# Altium PCB LAN9512_pcb.PcbDoc (part 1 of 2)
Units mm, origin at the board's own origin, x right, y up, seen from the top; angles counter-clockwise.
Board outline 57.95 x 40.02 mm, 2 copper layers (Top Layer, Bottom Layer), stack 1.671 mm thick; 67 components, 38 nets, 238 pads, 97 vias.
Unrouted connection lines stored in the file: 1.
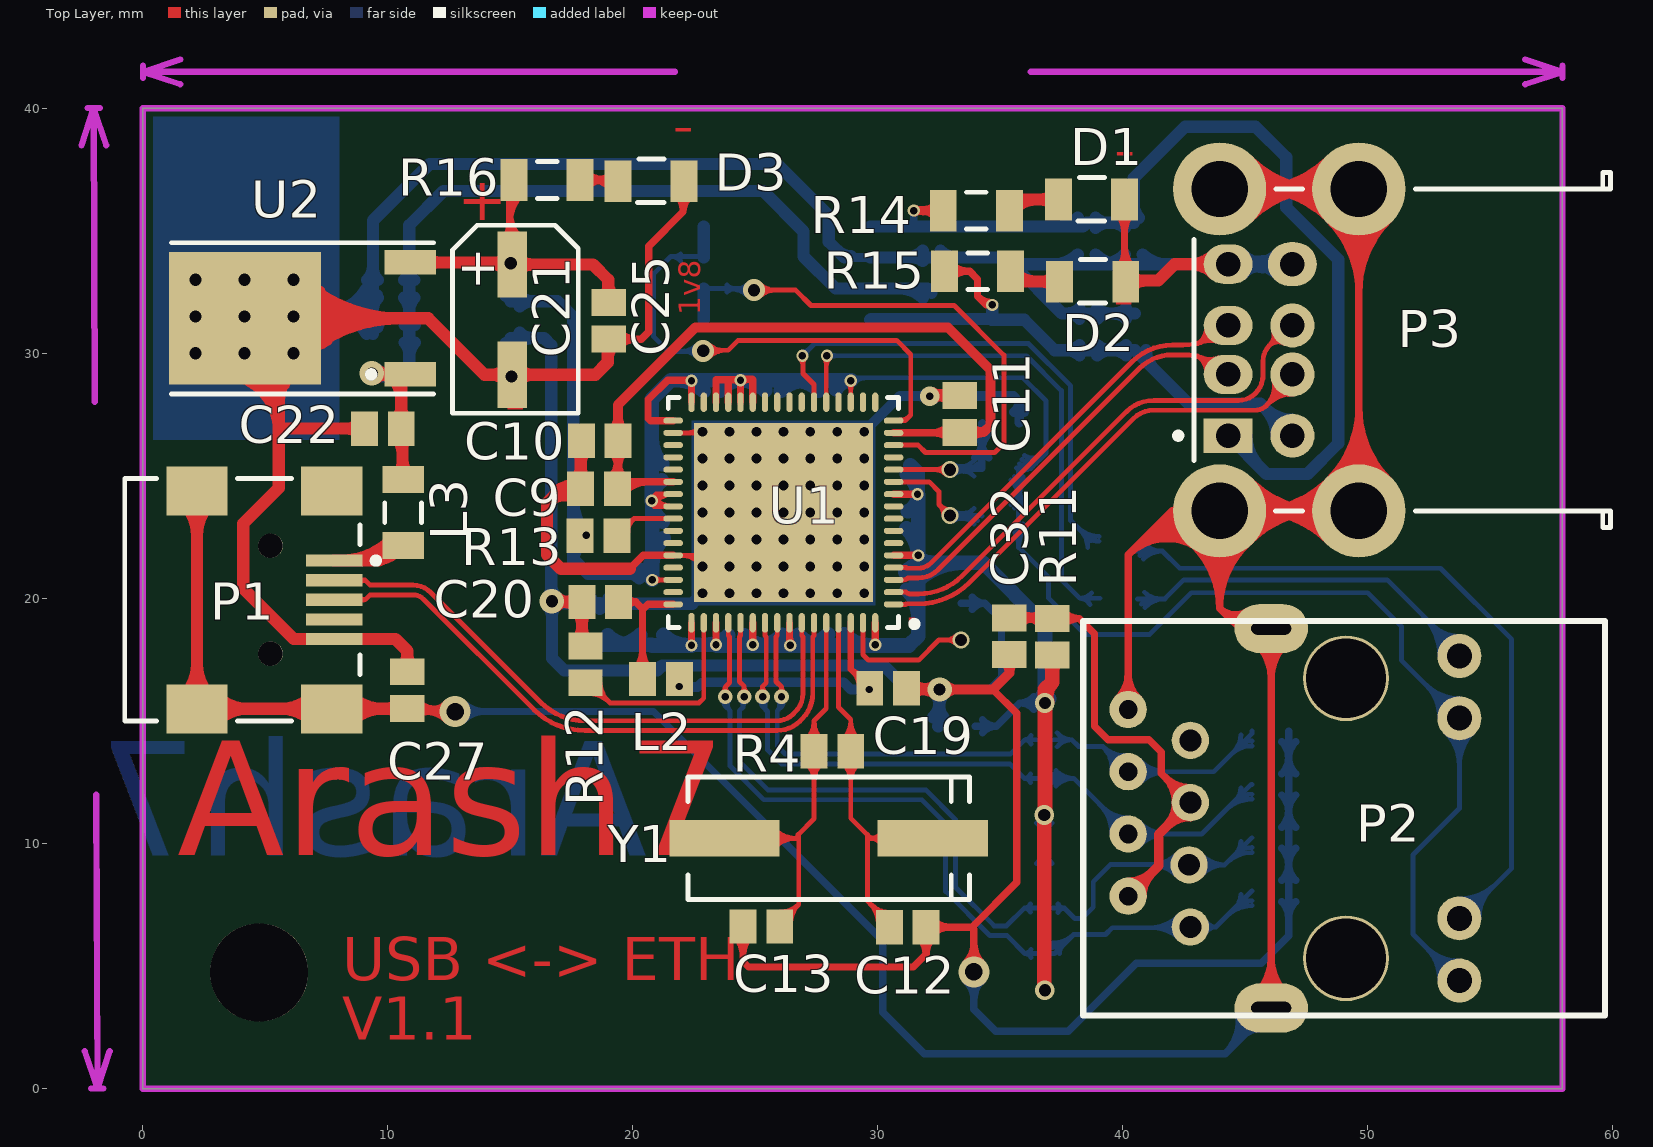
[diagram p0: Top Layer view]
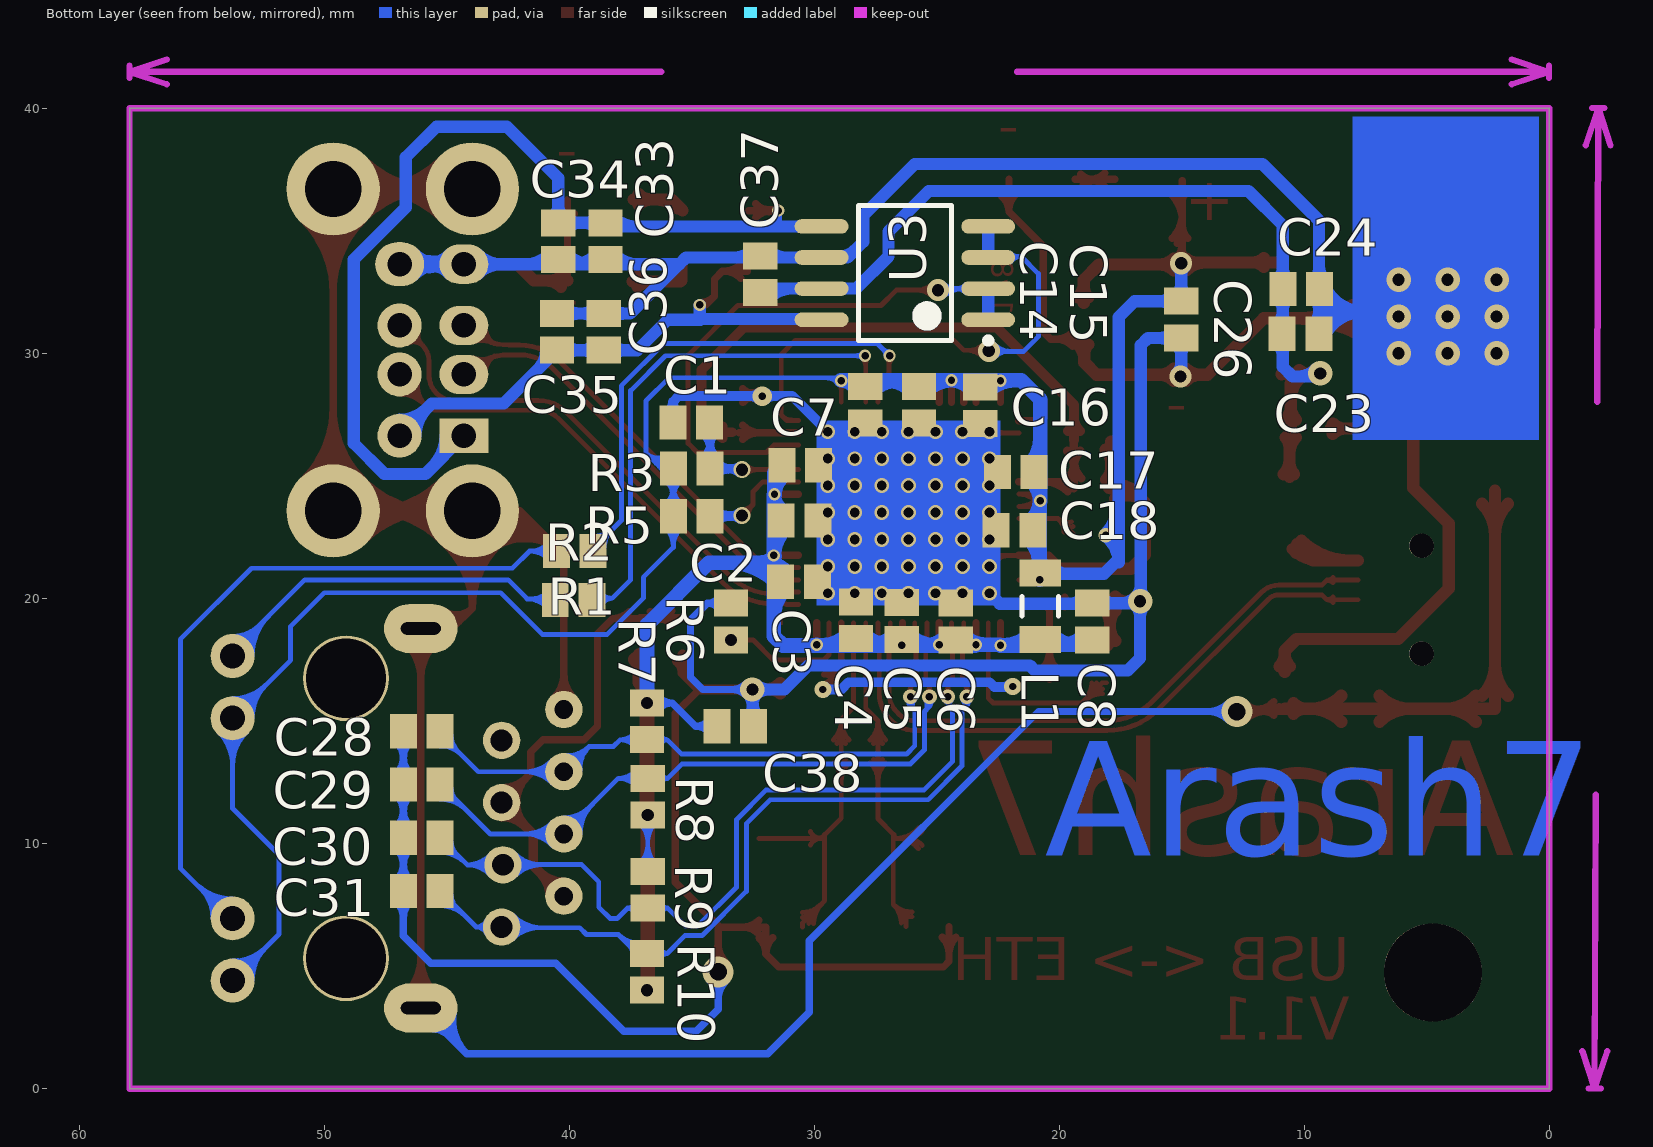
[diagram p1: Bottom Layer view, seen from below]

## Layer stack, top to bottom
Top Layer: signal copper 0.0356
Dielectric: core 1.6, FR-4, Dk 4.8
Bottom Layer: signal copper 0.0356

## Board outline
0,0 0,40.025 57.95,40.025 57.95,0

## Design rules (kind name [scope] priority, off if disabled: settings)
Clearance [All] p1: gap=0.1
DiffPairsRouting DiffPair_ETH_RXDiffPairsRouting [All] p1: maxlimit=0.2 minlimit=0.2 mostfreqgap=0.2 maxuncoupledlength=12.7
DiffPairsRouting [All] p2: maxlimit=0.254 minlimit=0.254 mostfreqgap=0.254 maxuncoupledlength=12.7
MatchedLengths DiffPair_ETH_RXMatchedLengths [All] p1: tolerance=25.4 checknetsindiffpair=TRUE checkdiffpairvsdiffpair=TRUE checkothers=TRUE
PolygonConnect [All] p1: connectstyle=Relief reliefconductorwidth=0.254 reliefentries=4 polygonreliefangle="90 Angle" airgapwidth=0.254
RoomDefinition USB_ETH_Sch [InComponentClass('USB_ETH_Sch')] p1: confinementstyle=ConfineOut formatcopy=TRUE lockcomponents=FALSE outline 62.475,19.724 159.856,19.724 159.856,44.275 62.475,44.275
RoomDefinition Schematic_1 [InComponentClass('Schematic_1')] p2: confinementstyle=ConfineOut formatcopy=TRUE lockcomponents=FALSE outline 62.5,1.449 187.6,1.449 187.6,17.475 62.5,17.475
RoutingVias [All] p1: holewidth=0.711 width=1.27 viastyle="Through Hole" minholewidth=0.711 minwidth=1.27 maxholewidth=0.711 maxwidth=1.27
SolderMaskExpansion [All] p1: expansion=0.102
Width DiffPair_ETH_RXWidth [All] p1: maxlimit=1 minlimit=0.2 preferedwidth=0.2
Width [All] p2: maxlimit=1 minlimit=0.2 preferedwidth=0.2
27 further rules are at their usual default settings.

## Classes and differential pairs
component class Schematic_1: C1 C2 C3 C4 C5 C6 C7 C8 C9 C10 C11 C12 C13 C14 C15 C16 C17 C18 C19 C20 C21 C22 C23 C24 C25 C26 C27 D3 L1 L2 L3 P1 R1 R2 R3 R4 R16 U1 U2 Y1
component class USB_ETH_Sch: C28 C29 C30 C31 C32 C33 C34 C35 C36 C37 C38 D1 D2 P2 P3 R5 R6 R7 R8 R9 R10 R11 R12 R13 R14 R15 U3
differential pair RX: +RX_P -RX_N
differential pair TX: +TX_P -TX_N
differential pair USB0: +USB0_P -USB0_N
differential pair USB3: +USB3_P -USB3_N
differential pair USB2: +USB2_P -USB2_N

## Components (designator, comment, footprint, x,y, rotation, side; value= is the part's Value field where it differs from the comment)
C1 "Cap" C0805 35.025,27.2 r180 bottom
C2 "Cap" C0805 30.6,23.2 r0 bottom
C3 "Cap" C0805 30.625,20.7 r0 bottom
C4 "Cap" C0805 28.3,19.125 r270 bottom
C5 "Cap" C0805 26.425,19.1 r270 bottom
C6 "Cap" C0805 24.225,19.075 r270 bottom
C7 "Cap" C0805 30.575,25.45 r0 bottom
C8 "Cap" C0805 18.65,19.075 r270 bottom
C9 "Cap" C0805 18.625,24.5 r0 top
C10 "Cap" C0805 18.65,26.45 r0 top
C11 "Cap" C0805 33.35,27.55 r270 top
C12 "Cap" C0805 31.225,6.6 r180 top
C13 "Cap" C0805 25.25,6.625 r0 top
C14 "Cap" C0805 27.925,27.925 r90 bottom
C15 "Cap" C0805 25.725,27.925 r90 bottom
C16 "Cap" C0805 23.225,27.9 r90 bottom
C17 "Cap" C0805 21.775,25.175 r180 bottom
C18 "Cap" C0805 21.825,22.8 r180 bottom
C19 "Cap" C0805 30.425,16.35 r180 top
C20 "Cap" C0805 18.675,19.875 r0 top
C21 "Capacitor" Capacitor 14.975,31.4 r90 top
C22 "Cap" C0805 9.8,26.95 r0 top
C23 "Cap" C0805 10.15,30.825 r0 bottom
C24 "Cap" C0805 10.125,32.65 r0 bottom
C25 "Cap" C0805 19.025,31.35 r90 top
C26 "Cap" C0805 15.025,31.4 r90 bottom
C27 "Cap" C0805 10.8,16.275 r270 top
C28 "Cap" C0805 46.025,14.6 r180 bottom
C29 "Cap" C0805 46.025,12.425 r180 bottom
C30 "Cap" C0805 46.025,10.25 r180 bottom
C31 "Cap" C0805 46.025,8.075 r180 bottom
C32 "Cap" C0805 35.375,18.475 r90 top
C33 "Cap" C0805 38.525,34.6 r90 bottom
C34 "Cap" C0805 40.45,34.6 r90 bottom
C35 "Cap" C0805 40.5,30.9 r270 bottom
C36 "Cap" C0805 38.6,30.9 r270 bottom
C37 "Cap" C0805 32.2,33.25 r270 bottom
C38 "Cap" C0805 33.225,14.8 r0 bottom
D1 "LED0" SMD_LED_1206 38.725,36.3 r0 top
D2 "LED0" SMD_LED_1206 38.775,32.95 r0 top
D3 "LED0" SMD_LED_1206 20.75,37.05 r0 top
L1 "Inductor" C1206 20.775,19.7 r270 bottom
L2 "Inductor" C0805 21.15,16.725 r180 top
L3 "Inductor" C1206 10.625,23.525 r270 top
P1 "Mini USB" "Mini USB" 4.45,20.175 r180 top
P2 "SK02-111008BNL" RJ45+MAG 48.225,11.175 r0 top
P3 "USB Dual" USB_Duble 50.15,30.4 r0 top
R1 "Res1" c0805 39.825,19.95 r180 bottom
R2 "Res1" c0805 39.775,21.95 r180 bottom
R3 "Res1" c0805 35,25.325 r0 bottom
R4 "Res1" c0805 28.15,13.775 r0 top
R5 "Res1" c0805 35,23.375 r180 bottom
R6 "Res1" c0805 33.4,19.075 r270 bottom
R7 "Res1" c0805 36.825,15 r90 bottom
R8 "Res1" c0805 36.8,11.925 r270 bottom
R9 "Res1" c0805 36.8,8.125 r90 bottom
R10 "Res1" c0805 36.825,4.775 r270 bottom
R11 "Res1" c0805 37.125,18.45 r270 top
R12 "Res1" c0805 18.075,17.325 r270 top
R13 "Res1" c0805 18.6,22.575 r0 top
R14 "Res1" C1206 34.025,35.85 r180 top
R15 "Res1" C1206 34.075,33.375 r180 top
R16 "Res1" C1206 16.5,37.1 r180 top
U1 "ETH-USB" QFN64 26.15,23.525 r180 top
U2 "LF33ABDT" LF33-TO-252 7.55,31.45 r90 top
U3 "MIC2026" SSOP8 26.3,33.3 r0 bottom
Y1 "XTAL" SMD_Crystal 28,10.225 r180 top

## Footprints (in the part's own frame and the unit in brackets; to place one, negate y for a bottom-side part, rotate by r counter-clockwise, add the part's x,y. Pads: shape width x height; smd on the part's side, far side on the other; paste and mask are expansions set on the pad)
C0805 [mm] "Chip Capacitor, Body 2.0x1.3mm, IPC High Density"
  rect 1.1x1.4 smd: 1(-0.75,0) 2(0.75,0)
  body extent -1.1,-0.72 1.1,0.72, height 1.4
c0805 [mm] "Chip Capacitor, Body 2.0x1.3mm, IPC High Density"
  rect 1.1x1.4 smd: 1(-0.75,0) 2(0.75,0)
  body extent -1.1,-0.72 1.1,0.72, height 1.4
C1206 [mm] "Chip Capacitor, Body 3.2x1.6mm, IPC High Density"
  rect 1.1x1.7 smd: 1(-1.35,0) 2(1.35,0)
  silkscreen extent -0.4,-0.75 0.4,0.75, body extent -1.7,-0.9 1.7,0.9, height 1.3
Capacitor [mm] "SMD electrolite capacitor"
  rect 2.7x1.2 smd: 1(-2.25,-0.1) 2(2.25,-0.1)
  silkscreen extent -3.83,-2.8 3.85,2.32
LF33-TO-252 [mm]
  rect 1x2.1 smd: 1(-2.285,-3.375) 3(2.285,-3.375)
  rect 5.4x6.2 smd: 4(0,3.375)
  silkscreen extent -3.09,-4.32 3.09,6.38, body extent -3.3,-3.55 3.28,6.15, height 2.3
"Mini USB" [mm]
  rect 2.3x0.5 smd: 1(-3.362,-1.387) 2(-3.362,-0.587) 3(-3.362,0.213) 4(-3.362,1.013) 5(-3.362,1.813)
  rect 2.5x2 smd: 6(-3.262,4.663) 7(2.238,4.663) 8(-3.262,-4.237) 9(2.238,-4.237)
  round 1 hole 1 unplated: MH1(-0.762,2.413) MH2(-0.762,-1.987)
  silkscreen extent -5.19,-4.74 5.19,5.16, body extent -4.13,-4.85 5.12,5.05, height 3.93
QFN64 [mm] "QFN, 64-Leads, Body 9.00x9.00mm, Pitch 0.50mm, Thermal Pad 7.30x7.30mm, IPC Medium Density"
  oval 0.8x0.25 smd: 1(-4.5,3.75) 2(-4.5,3.25) 3(-4.5,2.75) 4(-4.5,2.25) 5(-4.5,1.75) 6(-4.5,1.25) 7(-4.5,0.75) 8(-4.5,0.25) 9(-4.5,-0.25) 10(-4.5,-0.75) 11(-4.5,-1.25) 12(-4.5,-1.75) 13(-4.5,-2.25) 14(-4.5,-2.75) 15(-4.5,-3.25) 16(-4.5,-3.75) 33(4.5,-3.75) 34(4.5,-3.25) 35(4.5,-2.75) 36(4.5,-2.25) 37(4.5,-1.75) 38(4.5,-1.25) 39(4.5,-0.75) 40(4.5,-0.25) 41(4.5,0.25) 42(4.5,0.75) 43(4.5,1.25) 44(4.5,1.75) 45(4.5,2.25) 46(4.5,2.75) 47(4.5,3.25) 48(4.5,3.75)
  oval 0.25x0.8 smd: 17(-3.75,-4.5) 18(-3.25,-4.5) 19(-2.75,-4.5) 20(-2.25,-4.5) 21(-1.75,-4.5) 22(-1.25,-4.5) 23(-0.75,-4.5) 24(-0.25,-4.5) 25(0.25,-4.5) 26(0.75,-4.5) 27(1.25,-4.5) 28(1.75,-4.5) 29(2.25,-4.5) 30(2.75,-4.5) 31(3.25,-4.5) 32(3.75,-4.5) 49(3.75,4.5) 50(3.25,4.5) 51(2.75,4.5) 52(2.25,4.5) 53(1.75,4.5) 54(1.25,4.5) 55(0.75,4.5) 56(0.25,4.5) 57(-0.25,4.5) 58(-0.75,4.5) 59(-1.25,4.5) 60(-1.75,4.5) 61(-2.25,4.5) 62(-2.75,4.5) 63(-3.25,4.5) 64(-3.75,4.5)
  rect 7.3x7.3 smd: 65(0,0)
  silkscreen extent -5.48,-4.7 4.7,4.7, body extent -4.52,-4.52 4.52,4.52, height 0.9
RJ45+MAG [mil]
  round 60 hole 35.04: 1(-215,-180) 3(-217.13,-80) 5(-215,20) 7(-215,120)
  round 60 hole 30: 2(-315,-130.39) 4(-315,-30.39) 6(-315,69.61) 8(-315,169.61)
  round 137.8 hole 127.95: 3.25(35,-230.2) 3.25(35,219.8)
  round 70.87 hole 40.16: 9(217.28,-266.02) 10(217.28,-166.02) 11(217.28,155.63) 12(217.28,255.63)
  oval 118.11x78.74 hole 19.68 slot 64.17 at 0 deg: 13(-85.08,-310.12) 13(-85.08,299.72)
  silkscreen extent -387,-322 451,312, body extent -378,-321 462,309, height 580
SMD_Crystal [mm]
  rect 4.5x1.5 smd: 1(-4.25,0) 2(4.25,0)
  silkscreen extent -5.75,-2.5 5.75,2.5, body extent -6.25,-2.4 6.25,2.4, height 4
SMD_LED_1206 [mm] "Chip Capacitor, 2-Leads, Body 1.00x0.50mm, IPC Medium Density"
  rect 1.1x1.7 smd: 1(-1.35,0) 2(1.35,0)
  silkscreen extent -0.55,-0.87 0.53,0.9, body extent -1.6,-0.8 1.6,0.8, height 1.1
SSOP8 [mm]
  oval 2.2x0.6 smd: 1(-3.4,1.905) 2(-3.4,0.635) 3(-3.4,-0.635) 4(-3.4,-1.905) 5(3.4,-1.905) 6(3.4,-0.635) 7(3.4,0.635) 8(3.4,1.905)
  silkscreen extent -3.52,-2.75 1.9,2.88, body extent -4,-2.62 4,2.63, height 2.58
USB_Duble [mm]
  rect 2x1.4 hole 1: 1(-5.842,-3.738)
  oval 2x1.6 hole 1: 2(-5.842,-1.238) 3(-5.842,0.762) 4(-5.842,3.262)
  round 1.8 hole 1: 5(-3.222,-3.738) 6(-3.222,-1.238) 7(-3.222,0.762)
  oval 2x1.8 hole 1: 8(-3.222,3.262)
  round 3.8 hole 2.3: 9(-0.512,6.332) 10(-0.512,-6.808) 11(-6.192,6.332) 12(-6.192,-6.808)
  silkscreen extent -8.01,-7.49 9.77,7.01, body extent -7.35,-8.15 9.8,7.64, height 16.25

## Part data
C1 C2 C3 C4 C5 C6 C7 C8 C9 C10 C11 C12 C13 C14 C15 C16 C17 C18 C19 C20 C22 C23 C24 C25 C26 C27 C28 C29 C30 C31 C32 C33 C34 C35 C36 C37 C38: "Capacitor"
C21: library part "SMS capacitor"
D1 D2 D3: "Typical INFRARED GaAs LED"
P2: "Ethernet"
P3: library part USB_Double_Female
R1 R2 R3 R4 R5 R6 R7 R8 R9 R10 R11 R12 R13 R14 R15 R16: "Resistor"
U1: library part LAN9512, "USB Hub to LAN connevtor"
U2: "500mA, Very Low Drop (0.45V) Voltage Regulator"
Y1: "Crystal Oscillator"

## Free pads (board coordinates)
  round 4 hole 4: 1(4.75,4.75)

## Via types
v1: diameter 0.6, hole 0.4, Top Layer to Bottom Layer, 49 vias
v2: diameter 0.5, hole 0.3, Top Layer to Bottom Layer, 16 vias
v3: diameter 1, hole 0.5, Top Layer to Bottom Layer, 12 vias
v4: diameter 0.6, hole 0.3, Top Layer to Bottom Layer, 5 vias
v5: diameter 0.9, hole 0.5, Top Layer to Bottom Layer, 4 vias
v6: diameter 0.8, hole 0.5, Top Layer to Bottom Layer, 3 vias
v7: diameter 0.7, hole 0.5, Top Layer to Bottom Layer, 3 vias
v8: diameter 1.27, hole 0.711, Top Layer to Bottom Layer, 2 vias
v9: diameter 0.7, hole 0.3, Top Layer to Bottom Layer, 2 vias
v10: diameter 0.8, hole 0.3, Top Layer to Bottom Layer, 1 vias

## Nets (pads, with @x,y where several pads share a name; then routed paths per layer and width w, separated by ;. In a path a pad name is that pad's centre, name@x,y a point inside that pad or via, vN(x,y) a via of type N, cw(c..) or ccw(c..) an arc to the next point about the centre after c; other vN are vias at no path point)
E: C27.2 P1.6 P1.7 P1.8 P1.9 P2.8 P2.13 P3.9 P3.10 P3.11 P3.12 | length 322.1
  Top Layer w0.3: C27.2@10.787,15.512 10.899,15.4 v8(12.75,15.4) ; C27.2@11.021,15.596 ccw(c11.493,16.068) C27.2@11.493,15.4 ; C27.2@11.233,15.242 cw(c11.614,14.861) 11.614,15.4 ; C27.2@11.233,15.808 ccw(c12.217,16.792) v8@12.217,15.4 ; 11.752,15.525 ccw(c11.913,16.127) v8@12.384,15.718 ; 11.905,15.484 cw(c11.723,14.807) v8@12.33,15.157 ; v8@12.407,15.057 ccw(c11.579,14.229) 11.579,15.4 ccw(c11.579,16.571) v8@12.407,15.743 ; P2.8@39.791,15.916 ccw(c38.746,16.96) 40.224,16.96 ccw(c41.701,16.96) P2.8@40.657,15.916 ; P2.8@40.224,15.483 40.224,21.799 ; 40.49,22.065 cw(c42.025,20.529) P3.12@43.184,22.366 ; 40.755,22.33 cw(c42.231,20.854) P3.12@43.344,22.619 ; 41.021,22.596 cw(c42.436,21.18) P3.12@43.504,22.873 ; 41.286,22.861 cw(c42.642,21.506) P3.12@43.665,23.127 ; 41.552,23.127 cw(c42.847,21.831) P3.12@43.825,23.381 ; 41.817,23.392 cw(c43.052,22.157) P3.12@43.985,23.634 ; P3.12@42.217,23.411 ccw(c42.017,23.391) 42.017,23.592 ; P3.12@42.217,23.773 cw(c42.017,23.793) 42.017,23.592 ; P3.12@42.776,22.301 cw(c40.319,19.617) 43.958,19.617 ; P3.12@42.979,22.523 cw(c40.943,20.299) 43.958,20.299 cw(c46.973,20.299) P3.12@44.937,22.523 ; P3.12@43.024,22.112 ccw(c41.82,20.203) 40.224,21.799 ; P3.12@43.181,22.744 cw(c41.567,20.98) 43.958,20.98 cw(c46.349,20.98) P3.12@44.735,22.744 ; P3.12@43.384,22.965 cw(c42.19,21.661) 43.958,21.661 cw(c45.726,21.661) P3.12@44.532,22.965 ; P3.11@43.958,36.732 P3.9@49.638,36.732 P3.10@49.638,23.592 P3.12@43.958,23.592 ; 44.219,19.356 ccw(c44.807,19.944) P2.13@45.263,19.248 ; 44.48,19.095 ccw(c45.014,19.629) P2.13@45.427,18.997 ; P3.12@44.559,22.991 cw(c46.01,21.54) 46.01,23.592 cw(c46.01,25.644) P3.12@44.559,24.193 ; P3.11@44.559,36.131 cw(c46.01,34.68) 46.01,36.732 cw(c46.01,38.784) P3.11@44.559,37.333 ; P3.12@44.771,22.779 cw(c46.734,20.816) 46.734,23.592 cw(c46.734,26.368) P3.12@44.771,24.405 ; P3.11@44.771,35.919 cw(c46.734,33.956) 46.734,36.732 cw(c46.734,39.508) P3.11@44.771,37.545 ; P3.12@44.983,22.567 cw(c47.459,20.091) 47.459,23.592 cw(c47.459,27.093) P3.12@44.983,24.617 ; P3.11@44.983,35.707 cw(c47.459,33.231) 47.459,36.732 cw(c47.459,40.233) P3.11@44.983,37.757 ; P2.13@45.098,19.499 cw(c44.601,20.26) 43.958,19.617 ; P3.12@45.14,22.301 ccw(c47.597,19.617) 43.958,19.617 ; P3.12@45.195,22.355 cw(c48.183,19.367) 48.183,23.592 cw(c48.183,27.817) P3.12@45.195,24.829 ; P3.11@45.195,35.495 cw(c48.183,32.507) 48.183,36.732 cw(c48.183,40.957) P3.11@45.195,37.969 ; P2.13@45.463,3.899 ccw(c44.012,5.35) 46.064,5.35 ccw(c48.116,5.35) P2.13@46.665,3.899 ; P2.13@45.463,18.187 cw(c44.012,16.736) 46.064,16.736 cw(c48.116,16.736) P2.13@46.665,18.187 ; P3.12@45.67,23.228 cw(c45.997,23.158) 46.051,23.489 cw(c46.12,23.921) P3.12@45.688,23.855 ; P3.12@45.67,23.956 ccw(c45.997,24.026) 46.051,23.695 ccw(c46.12,23.263) P3.12@45.688,23.329 ; P3.11@45.67,36.368 cw(c45.997,36.298) 46.051,36.629 cw(c46.12,37.061) P3.11@45.688,36.995 ; P3.11@45.67,37.096 ccw(c45.997,37.166) 46.051,36.835 ccw(c46.12,36.403) P3.11@45.688,36.469 ; P2.13@45.675,3.687 ccw(c44.736,4.626) 46.064,4.626 ccw(c47.392,4.626) P2.13@46.453,3.687 ; P2.13@45.675,18.399 cw(c44.736,17.46) 46.064,17.46 cw(c47.392,17.46) P2.13@46.453,18.399 ; P2.13@46.064,3.298 P2.13@46.064,18.788 44.787,18.788 43.958,19.617 ; P3.10@48.401,22.355 ccw(c45.413,19.367) 45.413,23.592 ccw(c45.413,27.817) 48.401,24.829 ccw(c45.413,27.817) 49.638,27.817 ccw(c53.863,27.817) P3.10@50.875,24.829 ; P3.9@48.401,37.969 cw(c45.413,40.957) 45.413,36.732 cw(c45.413,32.507) 48.401,35.495 cw(c45.413,32.507) 49.638,32.507 cw(c53.863,32.507) P3.9@50.875,35.495 ; P3.10@48.613,22.567 ccw(c46.137,20.091) 46.137,23.592 ccw(c46.137,27.093) 48.613,24.617 ccw(c46.137,27.093) 49.638,27.093 ccw(c53.139,27.093) P3.10@50.663,24.617 ; P3.9@48.613,37.757 cw(c46.137,40.233) 46.137,36.732 cw(c46.137,33.231) 48.613,35.707 cw(c46.137,33.231) 49.638,33.231 cw(c53.139,33.231) P3.9@50.663,35.707 ; P3.10@48.825,22.779 ccw(c46.862,20.816) 46.862,23.592 ccw(c46.862,26.368) 48.825,24.405 ccw(c46.862,26.368) 49.638,26.368 ccw(c52.414,26.368) P3.10@50.451,24.405 ; P3.9@48.825,37.545 cw(c46.862,39.508) 46.862,36.732 cw(c46.862,33.956) 48.825,35.919 cw(c46.862,33.956) 49.638,33.956 cw(c52.414,33.956) P3.9@50.451,35.919 ; P3.10@49.037,22.991 ccw(c47.586,21.54) 47.586,23.592 ccw(c47.586,25.644) 49.037,24.193 ccw(c47.586,25.644) 49.638,25.644 ccw(c51.69,25.644) P3.10@50.239,24.193 ; P3.9@49.037,37.333 cw(c47.586,38.784) 47.586,36.732 cw(c47.586,34.68) 49.037,36.131 cw(c47.586,34.68) 49.638,34.68 cw(c51.69,34.68) P3.9@50.239,36.131 ; 40.224,21.799 42.017,23.592 ; 42.017,23.592 P3.12@43.958,23.592 ; 43.958,19.617 P3.12@43.958,23.592
  Top Layer w0.5: P1.7@1.682,16.042 ccw(c0.401,17.323) 2.212,17.323 ccw(c4.023,17.323) P1.7@2.742,16.042 ; P1.9@1.682,23.882 cw(c0.401,22.601) 2.212,22.601 cw(c4.023,22.601) P1.9@2.742,23.882 ; P1.9@2.212,24.412 P1.7@2.212,15.512 P1.6@7.712,15.512 C27.2@10.787,15.512 ; P1.7@2.992,14.982 cw(c4.273,13.701) 4.273,15.512 cw(c4.273,17.323) P1.7@2.992,16.042 ; P1.6@6.932,14.982 ccw(c5.651,13.701) 5.651,15.512 ccw(c5.651,17.323) P1.6@6.932,16.042 ; P1.6@8.492,14.982 cw(c9.773,13.701) 9.773,15.512 cw(c9.773,17.323) P1.6@8.492,16.042 ; 9.894,15.512 ccw(c9.894,16.281) C27.2@10.438,15.737 ; 9.957,15.512 cw(c9.957,14.832) C27.2@10.438,15.313
  Bottom Layer w0.3: v8(12.75,15.4) 20.85,15.4 30.2,6.05 30.2,3.125 31.9,1.425 44.191,1.425 ; v8@13.093,15.057 cw(c13.921,14.229) 13.921,15.4 cw(c13.921,16.571) v8@13.093,15.743 ; 44.596,1.83 ccw(c43.503,2.922) P2.13@45.023,3.199 ; P2.13@44.728,3.145 cw(c42.819,2.797) 44.191,1.425 ; 44.967,2.201 cw(c45.564,1.603) P2.13@45.564,2.448 ; 45,2.234 ccw(c44.188,3.047) P2.13@45.318,3.253 ; P2.13@46.064,3.298 44.191,1.425
GND: C1.1 C2.1 C3.1 C4.1 C5.1 C6.1 C7.1 C8.1 C9.1 C10.1 C11.1 C12.1 C13.1 C14.1 C15.1 C16.1 C17.1 C18.1 C19.1 C20.1 C21.1 C22.1 C23.1 C24.1 C25.1 C26.1 C27.1 C28.1 C29.1 C30.1 C31.1 C32.1 C33.1 C34.1 C35.1 C36.1 C37.1 C38.1 D1.2 D2.2 D3.2 P1.5 P3.4 P3.8 R6.1 R12.1 U1.34 U1.44 U1.65 U2.4 U3.6 | length 429.4
  Top Layer w0.2: C10.1@17.875,26.425 C10.1@17.9,26.45 ; U1.44@21.65,21.775 U1.65@24.4,21.775 ; U1.34@21.65,26.775 22.9,26.775 v1(23.95,25.725) v1(25.05,24.625) v1(26.15,23.525) ; U1.44@21.804,21.775 cw(c21.804,19.179) U1.65@23.64,21.015 ; 22.246,26.775 ccw(c22.246,27.429) U1.65@22.709,26.966 ; 22.287,21.775 cw(c22.287,19.662) U1.65@23.781,21.156 ; 22.419,21.665 cw(c22.224,20.975) v1(22.85,21.325) cw(c23.017,20.923) U1.65@23.267,21.28 ; 22.488,26.775 cw(c22.488,26.463) U1.65@22.709,26.684 ; U1.65@22.661,21.721 cw(c22.526,21.186) U1.65@23.034,21.404 ; U1.65@22.77,21.775 cw(c22.77,20.145) U1.65@23.923,21.298 ; U1.65@22.85,26.625 cw(c22.85,26.142) 23.191,26.484 cw(c23.533,26.825) U1.65@23.05,26.825 ; U1.65@22.927,21.14 cw(c23.183,20.525) U1.65@23.565,21.071 ; U1.65@23.214,21.544 ccw(c23.571,22.066) U1.65@23.859,21.503 ; U1.65@23.435,21.579 ccw(c23.74,22.108) U1.65@23.898,21.518 ; U1.65@23.492,21.354 ccw(c23.745,21.725) v1(23.95,21.325) ; U1.65@23.591,21.489 cw(c23.414,21.181) U1.65@23.757,21.273 ; U1.65@23.75,25.725 ccw(c23.267,25.725) 23.609,26.066 ccw(c23.95,26.408) U1.65@23.95,25.925 ; U1.65@23.95,25.525 cw(c23.95,25.042) 24.291,25.384 cw(c24.633,25.725) U1.65@24.15,25.725 ; U1.65@24.85,24.625 ccw(c24.367,24.625) 24.709,24.966 ccw(c25.05,25.308) U1.65@25.05,24.825 ; U1.65@25.05,24.425 cw(c25.05,23.942) 25.391,24.284 cw(c25.733,24.625) U1.65@25.25,24.625 ; U1.65@25.95,23.525 ccw(c25.467,23.525) 25.809,23.866 ccw(c26.15,24.208) U1.65@26.15,23.725
  Top Layer w0.3: C25.1@19.025,30.6 20.35,30.6 20.65,30.9 20.65,34.4 22.05,35.8 D3.2@22.05,37.125 ; C25.1@19.458,30.317 cw(c20.141,29.634) 20.141,30.6 cw(c20.141,31.566) C25.1@19.458,30.883 ; 19.875,21.225 20.425,21.775 U1.44@21.65,21.775 ; D3.2@21.817,36.467 cw(c21.255,35.905) 22.05,35.905 ; 22.05,35.799 cw(c22.88,35.799) D3.2@22.354,36.441 ; C13.1@24.217,6.192 cw(c23.534,5.509) 24.5,5.509 cw(c25.466,5.509) C13.1@24.783,6.192 ; U1.65@24.4,21.775 v1(26.15,23.525) ; C13.1@24.5,6.625 24.5,5.2 24.725,4.975 31.45,4.975 31.975,5.5 ; U1.65@24.9,22.425 cw(c24.538,22.425) 24.794,22.169 cw(c25.05,21.913) U1.65@25.05,22.275 ; U1.65@25.05,22.575 ccw(c25.05,22.937) 25.306,22.681 ccw(c25.562,22.425) U1.65@25.2,22.425 ; U1.65@26,23.525 cw(c25.638,23.525) 25.894,23.269 cw(c26.15,23.013) U1.65@26.15,23.375 ; C12.1@31.695,6.164 cw(c31.047,5.5) 31.975,5.5 ; v10@32.15,28.3 C11.1@33.35,28.3 ; v10@32.252,28.49 ccw(c32.556,29.004) C11.1@32.71,28.428 ; C12.1@32.255,6.164 ccw(c32.903,5.5) 31.975,5.5 ; C12.1@32.258,6.317 cw(c32.941,5.634) 32.941,6.6 cw(c32.941,7.566) C12.1@32.258,6.883 ; v10@32.302,28.098 cw(c32.789,27.611) C11.1@32.789,28.3 ; v10@32.302,28.452 ccw(c32.668,28.818) C11.1@32.668,28.3 ; v10@32.306,28.103 cw(c32.544,27.877) 32.629,28.194 ; v10@32.342,28.15 cw(c32.852,27.855) C11.1@32.699,28.425 ; v10@32.342,28.4 ccw(c32.709,28.612) 32.599,28.202 ; C11.1@32.917,28.017 ccw(c32.234,27.334) 32.234,28.3 ccw(c32.234,29.266) C11.1@32.917,28.583 ; v8@33.582,5.118 ccw(c32.754,5.946) 33.925,5.946 ccw(c35.096,5.946) v8@34.268,5.118 ; v8(33.925,4.775) 33.925,6.525 33.85,6.6 ; 34.7,16.3 35.675,15.325 35.675,8.425 33.85,6.6 ; D1.2@39.792,35.717 cw(c39.109,35.034) 40.075,35.034 cw(c41.041,35.034) D1.2@40.358,35.717 ; D2.2@39.842,33.533 ccw(c39.28,34.095) 40.075,34.095 ; D2.2@40.075,33 D1.2@40.075,36.3 ; 40.075,34.336 ccw(c41.211,34.336) D2.2@40.408,33.533 ; 31.975,5.5 C12.1@31.975,6.6 33.85,6.6
  Top Layer w0.35: 17.9,29.075 17.975,29.15
  Top Layer w0.4: v3(32.525,16.3) 34.7,16.3 35.375,16.975 ; v3@32.737,16.088 cw(c33.249,15.576) 33.249,16.3 cw(c33.249,17.024) v3@32.737,16.512 ; C32.1@35.15,17.457 cw(c34.747,16.975) 35.375,16.975 ; C32.1@35.375,17.725 35.375,16.975 ; C32.1@35.6,17.457 ccw(c36.003,16.975) 35.375,16.975
  Top Layer w0.5: U2.4@3.882,29.1 cw(c3.225,26.87) 5.55,26.87 ; U2.4@3.902,29.993 ccw(c4.672,30.093) U2.4@4.267,29.431 ; U2.4@4.024,29.58 cw(c3.422,27.539) 5.55,27.539 ; U2.4@4.147,29.775 cw(c4.122,27.885) U2.4@5.612,29.048 ; U2.4@4.15,31.275 cw(c4.15,30.792) U2.4@4.491,31.134 ; U2.4@4.153,30.275 cw(c4.139,29.221) U2.4@4.97,29.87 ; U2.4@4.165,30.059 cw(c3.619,28.207) 5.55,28.207 ; U2.4@4.209,29.782 cw(c4.38,29.072) U2.4@4.761,29.695 ; U2.4@4.306,30.539 cw(c3.816,28.876) U2.4@5.55,28.876 ; U2.4@4.327,31.702 ccw(c4.935,32.31) U2.4@4.935,31.45 ; U2.4@4.393,30.084 ccw(c4.857,30.196) U2.4@4.608,29.789 ; U2.4@4.398,30.057 ccw(c6.002,30.267) U2.4@5.159,28.886 ; U2.4@4.4,31.525 ccw(c5.124,31.525) U2.4@4.612,31.013 ; U2.4@4.784,30.841 ccw(c6.15,32.206) U2.4@6.15,30.275 ; U2.4@5.365,31.45 ccw(c5.365,32.31) U2.4@5.973,31.702 ; U2.4@5.442,30.311 ccw(c4.766,31.254) U2.4@5.905,31.477 ; U2.4@5.499,32.551 cw(c4.877,31.72) U2.4@5.903,31.563 ; 5.55,27.889 cw(c8.136,27.889) 6.307,29.718 cw(c10.49,25.535) 10.49,31.45 cw(c10.49,37.365) U2.4@6.307,33.182 ; 5.55,27.973 cw(c8.202,27.973) U2.4@6.327,29.848 ; U2.4@5.55,29.18 cw(c6.995,29.18) U2.4@5.973,30.202 ; U2.4@5.6,30.425 cw(c8.076,27.949) 8.076,31.45 cw(c8.076,34.951) U2.4@5.6,32.475 ; U2.4@5.638,29.987 ccw(c6.15,30.499) U2.4@6.15,29.775 ; U2.4@5.749,28.751 ccw(c4.369,29.548) U2.4@5.909,29.96 ; U2.4@5.901,30.045 cw(c7.085,29.951) U2.4@6.481,30.974 ; U2.4@5.912,31.449 ccw(c6.42,31.611) U2.4@6.541,31.092 ; U2.4@5.954,30.071 cw(c9.283,26.742) 9.283,31.45 cw(c9.283,36.158) U2.4@5.954,32.829 ; U2.4@6.075,30.765 ccw(c5.606,31.418) U2.4@6.395,31.573 ; U2.4@6.167,32.051 cw(c5.812,31.577) U2.4@6.397,31.487 ; U2.4@6.192,30.272 ccw(c6.486,32.017) 7.512,30.575 ; U2.4@6.192,32.778 cw(c6.416,31.444) U2.4@7.201,32.547 ; U2.4@6.327,31.349 cw(c7.092,30.587) 7.36,31.633 ; U2.4@6.327,31.702 ccw(c6.935,32.31) U2.4@6.935,31.45 ; U2.4@6.388,31.601 ccw(c6.937,31.776) U2.4@7.068,31.215 ; U2.4@6.393,29.967 cw(c7.451,29.713) U2.4@6.882,30.641 ; U2.4@6.395,33.077 ccw(c7.891,33.394) U2.4@7.057,32.111 ; C22.1@8.838,26.738 ccw(c8.326,26.226) 8.326,26.95 ccw(c8.326,27.674) C22.1@8.838,27.162 ; C22.1@8.925,26.95 5.575,26.95 5.55,26.975 ; C27.1@10.588,17.237 ccw(c10.076,17.749) 10.8,17.749 ccw(c11.524,17.749) C27.1@11.012,17.237 ; C27.1@10.8,17.025 10.8,17.875 10.313,18.362 P1.5@7.812,18.362 6.163,18.362 4.1,20.425 4.1,23.075 5.55,24.525 5.55,26.975 ; 14.386,29.15 cw(c14.386,28.411) C21.1@14.909,28.934 ; C21.1@14.828,28.903 ccw(c14.23,28.305) 14.23,29.15 ccw(c14.23,29.995) C21.1@14.828,29.397 ; C21.1@15.191,28.934 cw(c15.714,28.411) 15.714,29.15 ; C21.1@15.322,28.903 cw(c15.92,28.305) 15.92,29.15 cw(c15.92,29.995) C21.1@15.322,29.397 ; v3@16.877,19.723 cw(c17.243,19.357) 17.243,19.875 ; v3@16.877,20.077 ccw(c17.364,20.564) 17.364,19.875 ; 16.963,24.388 cw(c17.557,23.794) C9.1@17.974,24.524 ; v3@16.975,19.875 C20.1@17.925,19.875 17.925,18.225 R12.1@18.075,18.075 ; C9.1@17.663,24.288 ccw(c17.151,23.776) 17.151,24.5 ccw(c17.151,25.224) C9.1@17.663,24.712 ; C9.1@17.663,24.862 ccw(c17.151,25.374) 17.875,25.374 ccw(c18.599,25.374) C9.1@18.087,24.862 ; C10.1@17.688,26.088 cw(c17.236,25.636) 17.875,25.636 ; R12.1@17.713,18.287 ccw(c17.201,18.799) 17.925,18.799 ccw(c18.649,18.799) R12.1@18.137,18.287 ; C20.1@17.713,19.513 cw(c17.201,19.001) 17.925,19.001 cw(c18.649,19.001) C20.1@18.137,19.513 ; C20.1@17.713,19.663 ccw(c17.201,19.151) 17.201,19.875 ccw(c17.201,20.599) C20.1@17.713,20.087 ; C9.1@17.726,24.089 ccw(c17.221,23.204) 16.5,23.925 ; 17.875,25.515 cw(c18.685,25.515) C10.1@18.112,26.088 ; C10.1@17.875,26.425 C9.1@17.875,24.5 17.075,24.5 16.5,23.925 ; C25.1@18.813,30.388 cw(c18.421,29.996) 18.975,29.996 ; 18.975,29.755 cw(c19.87,29.755) C25.1@19.237,30.388 ; C25.1@18.975,30.225 18.975,29.65 18.475,29.15 17.975,29.15 C21.1@15.075,29.15 13.95,29.15 11.65,31.45 U2.4@4.175,31.45 5.55,30.075 5.55,26.975 ; 19.875,21.225 17.075,21.225 16.5,21.8 16.5,23.925 ; C19.1@31.175,16.35 31.225,16.3 v3(32.525,16.3) ; C19.1@31.387,16.138 cw(c31.779,15.746) 31.779,16.3 ; C19.1@31.387,16.562 ccw(c32.02,17.195) 32.02,16.3 ; v3@32.348,16.123 ccw(c31.921,15.696) 31.921,16.3 ccw(c31.921,16.904) v3@32.348,16.477 ; D2.2@40.075,33 41.45,33 42.112,33.662 P3.4@44.308,33.662 ; D2.2@40.337,32.738 cw(c40.97,32.105) 40.97,33 ; D2.2@40.337,33.162 ccw(c40.729,33.554) 40.729,33 ; P3.4@43.719,33.273 ccw(c42.78,32.334) 42.78,33.662 ccw(c42.78,34.99) P3.4@43.719,34.051
  Bottom Layer w0.3: v3(32.525,16.3) 34.55,16.3 35.05,16.8 35.05,19.15 34.375,19.825 ; v3@32.772,16.053 cw(c33.37,15.455) 33.37,16.3 cw(c33.37,17.145) v3@32.772,16.547 ; R6.1@33.4,19.825 34.375,19.825 ; v8@33.582,4.432 cw(c32.754,3.604) 33.925,3.604 cw(c35.096,3.604) v8@34.268,4.432 ; R6.1@33.864,19.577 cw(c34.375,19.174) 34.375,19.825 ; R6.1@33.864,20.073 ccw(c34.375,20.476) 34.375,19.825 ; v8(33.925,4.775) 33.925,3.25 34.825,2.35 37.775,2.35 40.55,5.125 45.65,5.125 46.775,6.25 C31.1@46.775,8.075 C30.1@46.775,10.25 C29.1@46.775,12.425 C28.1@46.775,14.6 ; C31.1@46.492,7.642 cw(c45.809,6.959) 46.775,6.959 cw(c47.741,6.959) C31.1@47.058,7.642 ; C31.1@46.492,8.508 ccw(c45.809,9.191) 46.775,9.191 ccw(c47.741,9.191) C31.1@47.058,8.508 ; C30.1@46.492,9.817 cw(c45.809,9.134) 46.775,9.134 cw(c47.741,9.134) C30.1@47.058,9.817 ; C30.1@46.492,10.683 ccw(c45.809,11.366) 46.775,11.366 ccw(c47.741,11.366) C30.1@47.058,10.683 ; C29.1@46.492,11.992 cw(c45.809,11.309) 46.775,11.309 cw(c47.741,11.309) C29.1@47.058,11.992 ; C29.1@46.492,12.858 ccw(c45.809,13.541) 46.775,13.541 ccw(c47.741,13.541) C29.1@47.058,12.858 ; C28.1@46.492,14.167 cw(c45.809,13.484) 46.775,13.484 cw(c47.741,13.484) C28.1@47.058,14.167
  Bottom Layer w0.35: U3.6@28.64,33.935 U3.6@29.7,33.935
  Bottom Layer w0.4: v1(29.45,26.825) 30.9,28.275 v10(32.125,28.275) 35.538,28.275 35.775,28.038 ; v10@31.984,28.134 ccw(c31.642,27.792) 31.642,28.275 ccw(c31.642,28.758) v10@31.984,28.416 ; v10@32.266,28.134 cw(c32.608,27.792) 32.608,28.275 cw(c32.608,28.758) v10@32.266,28.416 ; C1.1@35.569,27.633 ccw(c35.275,28.037) 35.775,28.037 ; C1.1@35.775,27.2 35.775,28.038 ; C1.1@35.981,27.633 cw(c36.275,28.037) 35.775,28.037
  Bottom Layer w0.5: 7.5,31.775 7.55,31.725 ; 8.399,31.725 ccw(c8.399,33.041) C24.1@9.55,32.403 ; 8.431,31.725 cw(c8.431,30.396) C23.1@9.572,31.078 ; C24.1@9.113,32.645 cw(c7.55,33.511) 7.55,31.725 ; C23.1@9.142,30.821 ccw(c7.55,29.87) 7.55,31.725 ; C24.1@9.163,32.288 cw(c8.59,31.715) 9.4,31.715 ; C24.1@9.163,33.012 ccw(c8.59,33.585) 9.4,33.585 ; C23.1@9.4,30.825 9.4,31.725 ; 9.4,33.464 ccw(c10.039,33.464) C24.1@9.587,33.012 ; C26.1@14.813,30.438 cw(c14.301,29.926) 15.025,29.926 cw(c15.749,29.926) C26.1@15.237,30.438 ; 15.025,29.618 ccw(c15.593,29.618) v5@15.191,29.216 ; v5(15.05,29.075) 15.025,29.1 C26.1@15.025,30.65 16.375,30.65 16.675,30.35 16.675,19.625 16.7,19.6 16.7,17.575 17.2,17.075 21,17.075 21.2,17.275 30.25,17.275 31.225,16.3 v3(32.525,16.3) 32.525,14.85 C38.1@32.475,14.8 ; C26.1@15.387,30.438 cw(c15.899,29.926) 15.899,30.65 cw(c15.899,31.374) C26.1@15.387,30.862 ; v3@16.523,19.723 cw(c16.096,19.296) 16.7,19.296 cw(c17.304,19.296) v3@16.877,19.723 ; v3@16.523,20.077 ccw(c16.157,20.443) 16.675,20.443 ; 16.675,20.564 ccw(c17.364,20.564) 16.877,20.077 ccw(c17.485,20.685) 17.485,19.825 ; v3(16.7,19.9) 16.775,19.825 C8.1@18.65,19.825 ; C8.1@18.288,19.613 ccw(c17.776,19.101) 17.776,19.825 ccw(c17.776,20.549) C8.1@18.288,20.037 ; C8.1@18.65,19.6 18.85,19.8 22.425,19.8 v1(22.85,20.225) ; C8.1@19.012,19.613 cw(c19.464,19.161) 19.464,19.8 ; C8.1@19.012,20.037 ccw(c19.585,20.61) 19.585,19.8 ; 28.371,34.204 ccw(c28.9,34.733) U3.6@28.9,33.985 ; U3.6@28.64,33.935 28,34.575 28,35.65 25.9,37.75 11.7,37.75 9.4,35.45 9.4,31.725 ; U3.6@29.7,33.935 35.24,33.935 35.513,33.662 ; 31.169,33.935 ccw(c31.169,34.881) C37.1@31.838,34.212 ; 31.483,33.935 cw(c31.483,33.433) C37.1@31.838,33.788 ; C38.1@32.263,15.162 ccw(c31.63,15.795) 32.525,15.795 ; v3@32.348,16.477 cw(c31.921,16.904) 31.921,16.3 cw(c31.921,15.696) 32.348,16.123 cw(c31.921,15.696) 32.525,15.696 cw(c33.129,15.696) v3@32.702,16.123 ; 32.525,15.554 ccw(c33.079,15.554) C38.1@32.687,15.162 ; C37.1@32.562,33.788 cw(c32.917,33.433) 32.917,33.935 ; C37.1@32.562,34.212 ccw(c33.231,34.881) 33.231,33.935 ; 37.197,33.662 ccw(c37.197,35.028) C33.1@38.163,34.062 ; C36.1@38.238,31.438 ccw(c37.726,30.926) 37.726,31.65 ccw(c37.726,32.374) C36.1@38.238,31.862 ; C33.1@38.887,34.062 ccw(c39.853,35.028) C34.1@39.853,33.662 ; C36.1@38.962,31.438 cw(c39.474,30.926) 39.474,31.65 cw(c39.474,32.374) C36.1@38.962,31.862 ; C33.1@39.122,33.662 ccw(c39.122,35.028) C34.1@40.088,34.062 ; C35.1@40.138,31.438 ccw(c39.626,30.926) 39.626,31.65 ccw(c39.626,32.374) C35.1@40.138,31.862 ; C35.1@40.5,31.65 C36.1@38.6,31.65 37.525,31.65 35.513,33.662 ; C34.1@40.812,34.062 ccw(c41.778,35.028) 41.778,33.662 ; P3.4@43.719,33.273 ccw(c42.78,32.334) 42.78,33.662 ccw(c42.78,34.99) P3.4@43.719,34.051 ; P3.4@44.897,33.273 cw(c45.836,32.334) 45.836,33.662 cw(c45.836,34.99) P3.4@44.897,34.051 ; P3.4@44.92,33.298 cw(c45.514,32.775) 45.718,33.539 ; P3.4@44.92,34.026 ccw(c45.514,34.549) 45.718,33.785 ; P3.4@44.984,33.387 cw(c45.56,33.055) 45.388,33.697 ; P3.4@44.984,33.937 ccw(c45.56,34.269) 45.388,33.627 ; P3.8@46.368,33.202 ccw(c45.259,32.093) 45.259,33.662 ccw(c45.259,35.231) P3.8@46.368,34.122 ; P3.8@46.928,33.662 P3.4@44.308,33.662 35.513,33.662 ; 7.55,31.725 9.4,31.725 ; C23.1@9.188,31.187 ccw(c8.676,31.699) 9.4,31.699 ; C23.1@9.188,31.187 ccw(c8.676,31.699) 9.4,31.699 ; C23.1@9.188,31.187 ccw(c8.676,31.699) 9.4,31.699 ; 9.4,31.699 ccw(c10.124,31.699) C23.1@9.612,31.187 ; 9.4,31.699 ccw(c10.124,31.699) C23.1@9.612,31.187 ; 9.4,31.699 ccw(c10.124,31.699) C23.1@9.612,31.187 ; 9.4,31.725 ccw(c8.613,31.725) 9.165,32.286 cw(c8.613,31.725) 9.4,31.725 ; 9.4,31.836 cw(c10.039,31.836) C24.1@9.587,32.288 ; 9.4,31.836 cw(c10.039,31.836) C24.1@9.587,32.288 ; 9.4,31.836 cw(c10.039,31.836) C24.1@9.587,32.288
  other v1: 23.95,20.225 25.05,20.225 26.15,20.225 27.25,20.225 28.35,20.225 29.45,20.225 25.05,21.325 26.15,21.325 27.25,21.325 28.35,21.325 29.45,21.325 22.85,22.425 23.95,22.425 25.05,22.425 26.15,22.425 27.25,22.425 28.35,22.425 29.45,22.425 22.85,23.525 23.95,23.525 25.05,23.525 27.25,23.525 28.35,23.525 29.45,23.525 22.85,24.625 23.95,24.625 26.15,24.625 27.25,24.625 28.35,24.625 29.45,24.625 22.85,25.725 25.05,25.725 26.15,25.725 27.25,25.725 28.35,25.725 29.45,25.725 22.85,26.825 23.95,26.825 25.05,26.825 26.15,26.825 27.25,26.825 28.35,26.825
  other v3: 2.15,30.025 4.15,30.025 6.15,30.025 2.15,31.525 4.15,31.525 6.15,31.525 2.15,33.025 4.15,33.025 6.15,33.025
LINK: P2.12 R1.1 | length 23.4
  Bottom Layer w0.2: R1.1@40.6,20 41.725,20 ; R1.1@40.758,19.78 cw(c41.265,19.307) 41.265,20 ; R1.1@40.893,20.268 ccw(c41.541,20.916) 41.541,20 ; R1.1@40.904,19.643 cw(c41.725,18.878) 41.725,20 ; 52.263,19.312 cw(c50.619,17.668) P2.12@52.944,17.668 ; 52.604,18.971 cw(c51.302,17.668) P2.12@53.144,17.668 ; 52.657,18.918 ccw(c53.744,20.006) P2.12@53.744,18.468 ; 52.946,18.629 cw(c51.985,17.668) P2.12@53.344,17.668 ; 52.998,18.577 ccw(c53.744,19.323) P2.12@53.744,18.268 ; P2.12@53.744,17.668 53.744,17.831 50.8,20.775 42.5,20.775 41.725,20
NetC1_2: C1.2 R3.1 U1.12 | length 14.5
  Top Layer w0.2: U1.12@30.65,25.275 v7(32.95,25.275) v7@33,25.275 ; v7@32.773,25.098 ccw(c32.346,24.671) 32.346,25.275 ccw(c32.346,25.879) v7@32.773,25.452
  Bottom Layer w0.2: v7(32.95,25.275) 34.2,25.275 R3.1@34.25,25.325 ; v7@33.043,25.275 ccw(c33.043,26.532) R3.1@33.932,25.643 ; v7@33.075,25.492 ccw(c33.418,26.085) 33.595,25.423 ; v7@33.111,25.083 cw(c33.458,24.669) 33.597,25.191 ; v7@33.127,25.098 cw(c33.554,24.671) 33.554,25.275 cw(c33.554,25.879) v7@33.127,25.452 ; v7@33.167,25.15 cw(c33.618,24.889) 33.483,25.393 ; v7@33.167,25.4 ccw(c33.433,25.554) 33.354,25.256 ; v7@33.284,25.275 cw(c33.284,24.359) R3.1@33.932,25.007 ; 33.526,25.275 ccw(c33.526,26.049) R3.1@34.073,25.502
  Bottom Layer w0.3: R3.1@33.967,25.758 ccw(c33.284,26.441) 34.25,26.441 ccw(c35.216,26.441) R3.1@34.533,25.758 ; C1.2@33.992,26.767 cw(c33.37,26.145) 34.25,26.145 ; R3.1@34.25,25.325 34.25,27.175 C1.2@34.275,27.2 ; R3.1@34.25,26.024 cw(c35.301,26.024) C1.2@34.558,26.767
NetC12_2: C12.2 R4.2 U1.61 Y1.1 | length 25.1
  Top Layer w0.2: U1.61@28.4,19.025 28.4,15.575 28.9,15.075 R4.2@28.9,13.775 28.9,11.05 29.575,10.375 ; R4.2@28.582,13.307 cw(c27.814,12.539) 28.9,12.539 cw(c29.986,12.539) R4.2@29.218,13.307 ; R4.2@28.582,14.243 ccw(c27.814,15.011) 28.9,15.011 ccw(c29.986,15.011) R4.2@29.218,14.243 ; R4.2@28.723,13.448 cw(c28.296,13.021) 28.9,13.021 cw(c29.504,13.021) R4.2@29.077,13.448 ; R4.2@28.723,14.102 ccw(c28.296,14.529) 28.9,14.529 ccw(c29.504,14.529) R4.2@29.077,14.102 ; 29.689,7.561 cw(c28.878,6.75) C12.2@30.025,6.75 ; 29.749,7.501 ccw(c30.475,8.226) C12.2@30.475,7.2 ; C12.2@30.031,7.219 cw(c29.561,6.75) C12.2@30.225,6.75 ; C12.2@30.091,7.159 ccw(c30.475,7.543) C12.2@30.475,7 ; Y1.1@30.162,9.948 ccw(c29.725,9.742) 29.725,10.225 ; Y1.1@30.162,10.502 cw(c29.725,10.708) 29.725,10.225 ; C12.2@30.475,6.6 30.475,6.775 29.575,7.675 29.575,10.375 ; Y1.1@32.25,10.225 29.725,10.225 ; 29.575,10.375 29.725,10.225
NetC13_2: C13.2 R4.1 U1.60 Y1.2 | length 25.6
  Top Layer w0.2: Y1.2@25.594,9.935 cw(c26.219,9.406) 26.219,10.225 cw(c26.219,11.044) Y1.2@25.594,10.515 ; Y1.2@25.747,9.806 cw(c26.65,9.042) 26.65,10.225 ; Y1.2@25.747,10.644 ccw(c26.65,11.408) 26.65,10.225 ; Y1.2@25.89,10.112 cw(c26.025,10.088) 26.025,10.225 ; Y1.2@25.89,10.338 ccw(c26.025,10.362) 26.025,10.225 ; C13.2@26.008,7.025 ccw(c26.028,7.62) C13.2@26.449,7.199 ; C13.2@26.015,7.225 ccw(c26.049,8.251) 26.775,7.525 ; C13.2@26.25,6.625 26.25,7 26.775,7.525 ; C13.2@26.25,6.775 cw(c26.793,6.775) C13.2@26.409,7.159 ; C13.2@26.45,6.775 cw(c27.476,6.775) 26.751,7.501 ; 26.75,10.375 27.4,11.025 R4.1@27.4,13.775 27.4,15.025 27.9,15.525 U1.60@27.9,19.025 ; R4.1@27.082,13.307 cw(c26.314,12.539) 27.4,12.539 cw(c28.486,12.539) R4.1@27.718,13.307 ; R4.1@27.082,14.243 ccw(c26.314,15.011) 27.4,15.011 ccw(c28.486,15.011) R4.1@27.718,14.243 ; R4.1@27.223,13.448 cw(c26.796,13.021) 27.4,13.021 cw(c28.004,13.021) R4.1@27.577,13.448 ; R4.1@27.223,14.102 ccw(c26.796,14.529) 27.4,14.529 ccw(c28.004,14.529) R4.1@27.577,14.102 ; 26.025,10.225 26.65,10.225 ; 26.65,10.225 26.775,10.35 26.775,7.525